# Altium PCB c1yc_ldm.PcbDoc (part 2 of 2)
Units mm, origin at the board's own origin, x right, y up, seen from the top; angles counter-clockwise.
Board outline 258.33 x 60.81 mm, 2 copper layers (Top Layer, Bottom Layer); 98 components, 53 nets, 234 pads, 310 vias.
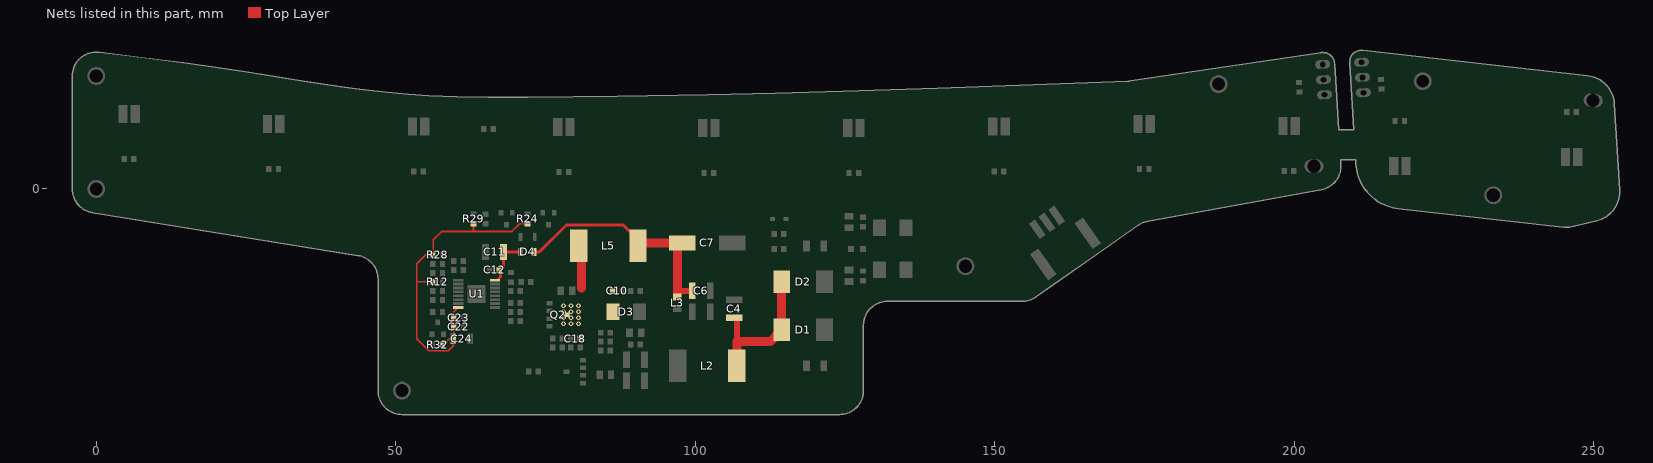
[diagram p2: the nets of this part, all layers, seen from the top]

## Via types
v1: diameter 0.8, hole 0.4, Top Layer to Bottom Layer, 246 vias
v2: diameter 1.2, hole 0.6, Top Layer to Bottom Layer, 50 vias
v3: diameter 0.7, hole 0.4, Top Layer to Bottom Layer, 9 vias
v4: diameter 1.5, hole 1, Top Layer to Bottom Layer, 2 vias
v5: diameter 1, hole 0.6, Top Layer to Bottom Layer, 2 vias
v6: diameter 1.4, hole 0.7, Top Layer to Bottom Layer, 1 vias

## Nets (pads, with @x,y where several pads share a name; then routed paths per layer and width w, separated by ;. In a path a pad name is that pad's centre, name@x,y a point inside that pad or via, vN(x,y) a via of type N, cw(c..) or ccw(c..) an arc to the next point about the centre after c; other vN are vias at no path point) (continued)
SW: C10.2 C18.1 D3.2 L5.1 Q2.5 | length 7.2
  Top Layer w1.5: L5.1@80.55,-9.5 81,-9.95 81,-16.5
  other v1: 78,-22.5 79.25,-22.5 80.5,-22.5 78,-21.5 79.25,-21.5 80.5,-21.5 78,-20.5 79.25,-20.5 80.5,-20.5 78,-19.5 79.25,-19.5 80.5,-19.5
VCOM: C4.2 D1.1 D2.1 L2.2 | length 23
  Top Layer w1: 106.95,-25.5 C4.2@106.95,-21.45
  Top Layer w1.5: L2.2@106.95,-29.5 106.95,-25.5 112.5,-25.5 D1.1@113.5,-24.5 ; D1.1@114.432,-23.5 D2.1@114.432,-15.5
VDD: C22.2 C23.2 C24.2 R12.2 R24.2 R28.2 R29.2 R32.2 U1.8 | length 54.8
  Top Layer w0.3: R12.2@56.2,-15.5 53.5,-15.5 ; R32.2@57.8,-26 57.925,-26 58.925,-25 C24.2@59.6,-25 59.6,-26.15 58.75,-27 55.5,-27 53.5,-25 53.5,-15.5 ; C24.2@59.7,-24.4 C22.2@59.7,-23 C23.2@59.7,-21.5 59.7,-20.525 U1.8@60.45,-19.775 ; R29.2@63,-5.8 63,-7 63.1,-7.1 ; R24.2@72,-5.8 70.7,-5.8 69.4,-7.1 63.1,-7.1 ; 53.5,-15.5 53.5,-12.5 55,-11 R28.2@56.2,-11 56.25,-10.95 56.25,-8.5 57.65,-7.1 63.1,-7.1
VIN: C11.2 C12.2 D4.1 U1.16 | length 8.1
  Top Layer w0.5: U1.16@67,-15.2 67.5,-14.7 67.5,-13.7 C12.2@67.3,-13.5 68,-12.8 C11.2@68,-10.5 D4.1@70.8,-10.5
VLED: C6.2 C7.1 D4.2 L3.1 L5.2 | length 40.5
  Top Layer w0.5: D4.2@73.2,-10.5 74,-10.5 78.5,-6 88,-6 90,-8 L5.2@90,-9.5
  Top Layer w1: L3.1@97,-17.5 97.5,-17 C6.2@99.5,-17
  Top Layer w1.5: L5.2@90,-9.5 90.5,-9 C7.1@97.8,-9 97,-9.8 L3.1@97,-17.5

## Polygon pours and split planes (outlines as drawn)
DGND on Top Layer "Top Ground" (solid, remove dead copper, pour order 213): 254.5,-7.5 254.5,25 209,25 209,-7.5
NetCL5_1 on Top Layer "Top Edge LED" (solid, remove dead copper, pour order 217): 102.512,13 105.5,13 106.5,12.5 106.5,11 102.512,11
NetCL4_1 on Top Layer "Top Edge LED" (solid, remove dead copper, pour order 220): 98,12.5 99,13 102.012,13 102.012,11.316 98,11.316
NetCL3_1 on Top Layer "Top Edge LED" (solid, remove dead copper, pour order 219): 73.5,13.956 77.799,13.956 77.799,11.5 73.5,11.5
NetCL4_1 on Top Layer "Top Edge LED" (solid, remove dead copper, pour order 216): 78.299,13.42 82.5,13.42 82.5,11.504 78.299,11.504
NetCL3_1 on Top Layer "Top Edge LED" (solid, remove dead copper, pour order 215): 54.055,13.464 58,13.464 58,12.001 54.055,12.001
NetCL2_1 on Top Layer "Top Edge LED" (solid, remove dead copper, pour order 218): 49.5,14 53.555,14 53.555,12 49.5,12
NetC27_2 on Top Layer "Top LED" (solid, remove dead copper, pour order 222): 206.86,17 206.86,-4.357 199.378,-4.357 199.378,17
GND_IN on Top Layer "Top" (solid, remove dead copper, pour order 221): 127,-20.5 169.5,-20.5 169.5,-1.5 127,-1.5
NetC30_2 on Top Layer "Top Dual LED" (solid, remove dead copper, pour order 210): 217.361,17 217.361,-4.857 207.36,-4.857 207.36,17
DGND on Top Layer "Top Dual LED" (solid, remove dead copper, pour order 211): 253.86,20 253.86,-7.5 246.543,-7.5 246.543,20
NetCL10_1 on Top Layer "Top Dual LED" (solid, remove dead copper, pour order 212): 246.06,20.643 246.06,-9.857 217.85,-9.857 217.85,20.643
NetCL8_1 on Top Layer "Top LED" (solid, remove dead copper, pour order 223): 198.874,20.143 198.874,2.5 186,0 175.203,0 175.203,20.143
NetCL7_1 on Top Layer "Top LED" (solid, remove dead copper, pour order 224): 174.699,18.143 174.699,0 150.958,0 150.958,18.143
NetCL6_1 on Top Layer "Top LED" (solid, remove dead copper, pour order 225): 150.454,16.643 150.454,0 126.712,0 126.712,16.643
NetCL5_1 on Top Layer "Top LED" (solid, remove dead copper, pour order 226): 126.209,15.143 126.209,0 102.509,0 102.509,15.143
NetCL4_1 on Top Layer "Top LED" (solid, remove dead copper, pour order 227): 102,16.643 102,0 78.3,0 78.3,16.643
NetCL3_1 on Top Layer "Top LED" (solid, remove dead copper, pour order 228): 77.8,19.143 77.8,0 54.055,0 54.055,19.143
NetCL2_1 on Top Layer "Top LED" (solid, remove dead copper, pour order 229): 53.555,19.143 53.555,0 29.88,0 29.88,19.143
NetCL1_1 on Top Layer "Top LED" (solid, remove dead copper, pour order 230): 29.41,25.143 29.41,0 5.73,0 5.73,25.143
NetCL1_2 on Top Layer "Top LED" (solid, remove dead copper, pour order 231): 5.25,25.143 5.25,-2.857 -5.538,-2.857 -5.538,25.143
GND_IN on Top Layer "Top ESD" (solid, remove dead copper, pour order 240): 207.5,-39.857 -24.64,-39.857 -24.64,25.143 207.5,25.143
NetCL1_2 on Top Layer "Top Layer-No Net" (solid, pour order 235): 73.5,-34 80.034,-34 80.034,-26 73.5,-26
NetC15_1 on Top Layer "Top Layer-No Net" (solid, pour order 234): 80,-34 82.5,-34 82.5,-26 80,-26
SW on Top Layer "Top Layer-No Net" (solid, pour order 233): 77.08,-25.5 82.41,-25.5 82.41,-16.5 77.08,-16.5
NetQ2_1 on Top Layer "Top Layer-No Net" (solid, pour order 232): 74.585,-25.557 77.085,-25.557 77.085,-16.557 74.585,-16.557
SW on Top Layer "Top Layer-No Net" (solid, pour order 236): 80,-22.5 88,-22.5 88,-18.25 87,-18.25 87,-16 80,-16 80,-20.5
NetC15_1 on Top Layer "Top Layer-No Net" (solid, pour order 237): 84.5,-32.5 84.5,-29.5 82.5,-29.5 82.5,-32.5
LP on Top Layer "Top Layer-No Net" (solid, pour order 238): 85.5,-29.5 87.5,-29.5 87.5,-23.5 89.5,-23.5 89.5,-34 86,-34 86,-32.5 85.5,-32.5
GND on Top Layer "Top Ground" (solid, remove dead copper, pour order 239): 206.86,-39.857 -24.64,-39.857 -24.64,25.143 206.86,25.143
LGND on Top Layer "Top ESD" (solid, remove dead copper, pour order 214): 209,25.143 255.36,25.143 255.36,-12.357 209,-12.357
DGND on Bottom Layer "Top Ground" (solid, remove dead copper, pour order 244): 254.5,-7.5 254.5,25 209,25 209,-7.5
NetCL4_1 on Bottom Layer "Top Edge LED" (solid, remove dead copper, pour order 251): 98,12.5 99,13 102.012,13 102.012,11.316 98,11.316
NetCL5_1 on Bottom Layer "Top Edge LED" (solid, remove dead copper, pour order 248): 102.512,13 105.5,13 106.5,12.5 106.5,11 102.512,11
NetCL4_1 on Bottom Layer "Top Edge LED" (solid, remove dead copper, pour order 247): 78.299,13.42 82.5,13.42 82.5,11.504 78.299,11.504
NetCL3_1 on Bottom Layer "Top Edge LED" (solid, remove dead copper, pour order 250): 73.5,13.956 77.799,13.956 77.799,11.5 73.5,11.5
NetCL2_1 on Bottom Layer "Top Edge LED" (solid, remove dead copper, pour order 249): 49.5,14 53.555,14 53.555,12 49.5,12
NetCL3_1 on Bottom Layer "Top Edge LED" (solid, remove dead copper, pour order 246): 54.055,13.464 58,13.464 58,12.001 54.055,12.001
GND_IN on Bottom Layer "Bottom ESD" (solid, remove dead copper, pour order 266): 206.86,-39.857 -24.64,-39.857 -24.64,25.143 206.86,25.143
GND on Bottom Layer "Bottom Ground" (solid, remove dead copper, pour order 265): 206.86,-39.857 -24.64,-39.857 -24.64,25.143 206.86,25.143
SW on Bottom Layer "Top Layer-No Net" (solid, pour order 264): 74.5,-25.531 82.5,-25.531 82.5,-16.531 74.5,-16.531
NetCL1_2 on Bottom Layer "Top Layer-No Net" (solid, pour order 263): 74.5,-35 82.5,-35 82.5,-26 74.5,-26
NetCL1_2 on Bottom Layer "Top LED" (solid, remove dead copper, pour order 262): 5.241,25.143 5.241,-2.857 -5.538,-2.857 -5.538,25.143
NetCL1_1 on Bottom Layer "Top LED" (solid, remove dead copper, pour order 261): 29.41,25.143 29.41,0 5.733,0 5.733,25.143
NetCL2_1 on Bottom Layer "Top LED" (solid, remove dead copper, pour order 260): 53.567,19.143 53.567,0 29.88,0 29.88,19.143
NetCL3_1 on Bottom Layer "Top LED" (solid, remove dead copper, pour order 259): 65,19.143 65,0 54.047,0 54.047,19.143
NetCL4_1 on Bottom Layer "Top LED" (solid, remove dead copper, pour order 257): 102.022,16.643 102.022,0 78.304,0 78.304,16.643
NetCL5_1 on Bottom Layer "Top LED" (solid, remove dead copper, pour order 256): 126.209,15.143 126.209,0 102.491,0 102.491,15.143
NetCL6_1 on Bottom Layer "Top LED" (solid, remove dead copper, pour order 255): 150.454,16.643 150.454,0 126.701,0 126.701,16.643
NetCL7_1 on Bottom Layer "Top LED" (solid, remove dead copper, pour order 254): 174.699,18.143 174.699,0 150.969,0 150.969,18.143
NetCL8_1 on Bottom Layer "Top LED" (solid, remove dead copper, pour order 253): 198.874,20.143 198.874,2.5 186,0 175.191,0 175.191,20.143
NetC27_2 on Bottom Layer "Top LED" (solid, remove dead copper, pour order 252): 206.86,13.5 206.86,-4.357 199.342,-4.357 199.342,20.643 202,20.643 202,14.5 203,13.5
NetCL10_1 on Bottom Layer "Bottom Dual LED" (solid, remove dead copper, pour order 243): 246.046,20.643 246.046,-9.857 217.85,-9.857 217.85,20.643
DGND on Bottom Layer "Bottom Dual LED" (solid, remove dead copper, pour order 242): 253.86,17.643 253.86,-9.857 246.543,-9.857 246.543,17.643
NetC30_2 on Bottom Layer "Bottom Dual LED" (solid, remove dead copper, pour order 241): 217.361,17.5 217.361,-4.857 207.36,-4.857 207.36,17.5
LGND on Bottom Layer "Bottom ESD" (solid, remove dead copper, pour order 245): 207.86,25.143 255.36,25.143 255.36,-12.357 207.86,-12.357
NetCL3_1 on Bottom Layer "Top LED" (solid, remove dead copper, pour order 258): 77.8,19.233 77.8,0 66,0 66,19.233

## Keep-outs
Keep-Out Layer:
  lines w1: -0.638,-3.949 cw(c0,0) -4,0 -4,18.863 cw(c0,18.863) 0.492,22.833 ; -0.638,-3.949 43.688,-11.107 ; -0.638,-3.949 -0.638,-3.949 ; 0.492,22.833 0.492,22.833 ; 0.492,22.833 6.956,22.031 15.177,20.975 19.285,20.396 25.447,19.456 34.69,17.982 40.857,17.063 43.944,16.653 48.579,16.127 52.059,15.814 55.543,15.578 60.194,15.382 65.368,15.303 69.51,15.309 72.152,15.325 87.024,15.485 102.13,15.754 113.317,16.009 124.644,16.309 124.644,16.309 ccw(c15.57,3785.374) 172.257,17.988 172.257,17.987 ccw(c172.092,21.983) 172.683,18.027 ; 43.688,-11.107 cw(c43.051,-15.055) 47.051,-15.055 47.051,-33.654 ccw(c51.051,-33.654) 51.051,-37.654 124.084,-37.654 ccw(c124.084,-33.654) 128.084,-33.654 128.084,-22.763 cw(c132.084,-22.763) 132.084,-18.763 154.542,-18.763 ccw(c154.542,-14.763) 156.836,-18.039 ; 43.688,-11.107 43.688,-11.107 ; 156.836,-18.039 159.855,-15.926 168.046,-10.19 174,-6.021 ; 156.836,-18.039 156.836,-18.039 ; 172.683,18.027 172.683,18.027 ; 172.683,18.027 204.436,22.77 ; 174,-6.021 cw(c176.294,-9.298) 175.581,-5.362 ; 174,-6.021 174,-6.021 ; 175.581,-5.362 204.501,-0.121 ; 175.581,-5.362 175.581,-5.362 ; 204.436,22.77 cw(c204.732,20.792) 206.728,20.917 ; 204.436,22.77 204.436,22.77 ; 204.501,-0.121 ccw(c203.788,3.815) 207.78,4.064 ; 204.501,-0.121 204.501,-0.121 ; 206.728,20.917 206.728,20.917 ; 206.728,20.917 207.418,9.863 ; 207.418,9.863 209.923,9.863 ; 207.418,9.863 207.73,4.863 ; 207.73,4.863 210.235,4.863 ; 207.73,4.863 207.78,4.064 ; 207.78,4.064 207.78,4.064 ; 209.923,9.863 209.225,21.033 cw(c211.221,21.157) 211.445,23.145 ; 209.923,9.863 210.235,4.863 ; 210.235,4.863 210.278,4.172 ccw(c218.263,4.671) 217.367,-3.279 ; 211.445,23.145 211.445,23.145 ; 211.445,23.145 248.989,18.916 ; 217.367,-3.279 244.89,-6.379 ; 217.367,-3.279 217.367,-3.279 ; 244.89,-6.379 ccw(c245.45,-1.41) 246.668,-6.26 ; 244.89,-6.379 244.89,-6.379 ; 246.668,-6.26 250.546,-5.285 ; 246.668,-6.26 246.668,-6.26 ; 248.989,18.916 cw(c248.43,13.947) 253.42,14.259 ; 248.989,18.916 248.989,18.916 ; 250.546,-5.285 ccw(c249.328,-0.436) 254.318,-0.124 ; 250.546,-5.285 250.546,-5.285 ; 253.42,14.259 253.42,14.259 ; 253.42,14.259 254.318,-0.124 ; 254.318,-0.124 254.318,-0.124

## Silkscreen, mask and mechanical layers (free items; w line width, h text height)
Top Overlay:
  region: 21.86,-23.357 31.86,-23.357 31.86,-27.357 21.86,-27.357
  text "PRK" at 164,-3 h1.2
  text "DRL" at 151,-10.5 h1.2
  text ".PartName" at -2.64,-19.357 h4
  text ".PartPCB" at -2.64,-22.857 h4
  text ".PartRevision" at 22.36,-22.857 h4
  text ".PartAssembly" at -2.64,-26.357 h4
Top Solder:
  rectangle: 62.25,-21.25 64.75,-19.75
  rectangle: 62.25,-15.25 64.75,-13.75
  rectangle: 77.25,-32.5 78.25,-28.5
  rectangle: 79,-23 80,-19
  lines w0.5: 4.48,9.982 3.48,9.982 2.48,10.482 2.48,14.482 3.48,14.982 4.48,14.982 ; 6.48,9.982 7.48,9.982 8.48,10.482 8.48,14.482 7.48,14.982 6.48,14.982 ; 28.633,8.359 27.633,8.359 26.633,8.859 26.633,12.859 27.633,13.359 28.633,13.359 ; 30.633,8.359 31.633,8.359 32.633,8.859 32.633,12.859 31.633,13.359 30.633,13.359 ; 52.806,7.898 51.806,7.898 50.806,8.398 50.806,12.398 51.806,12.898 52.806,12.898 ; 54.806,7.898 55.806,7.898 56.806,8.398 56.806,12.398 55.806,12.898 54.806,12.898 ; 77.049,7.854 76.049,7.854 75.049,8.354 75.049,12.354 76.049,12.854 77.049,12.854 ; 79.049,7.854 80.049,7.854 81.049,8.354 81.049,12.354 80.049,12.854 79.049,12.854 ; 83,-27 84.2,-27 ; 101.262,7.67 100.262,7.67 99.262,8.17 99.262,12.17 100.262,12.67 101.262,12.67 ; 103.262,7.67 104.262,7.67 105.262,8.17 105.262,12.17 104.262,12.67 103.262,12.67 ; 125.469,7.687 124.469,7.687 123.469,8.187 123.469,12.187 124.469,12.687 125.469,12.687 ; 127.469,7.687 128.469,7.687 129.469,8.187 129.469,12.187 128.469,12.687 127.469,12.687 ; 149.708,7.901 148.708,7.901 147.708,8.401 147.708,12.401 148.708,12.901 149.708,12.901 ; 151.708,7.901 152.708,7.901 153.708,8.401 153.708,12.401 152.708,12.901 151.708,12.901 ; 173.95,8.321 172.95,8.321 171.95,8.821 171.95,12.821 172.95,13.321 173.95,13.321 ; 175.95,8.321 176.95,8.321 177.95,8.821 177.95,12.821 176.95,13.321 175.95,13.321 ; 198.124,7.975 197.124,7.975 196.124,8.475 196.124,12.475 197.124,12.975 198.124,12.975 ; 200.124,7.975 201.124,7.975 202.124,8.475 202.124,12.475 201.124,12.975 200.124,12.975 ; 214.605,2.818 214.605,5.818 215.605,6.318 216.605,6.318 ; 218.605,1.318 219.605,1.318 220.605,1.818 220.605,5.818 219.605,6.318 218.605,6.318 ; 245.298,2.831 244.298,2.831 243.298,3.331 243.298,7.331 244.298,7.831 245.298,7.831 ; 247.298,2.831 248.298,2.831 249.298,3.331 249.298,7.331 248.298,7.831 247.298,7.831
Bottom Solder:
  rectangle: 79,-23 80,-19
  rectangle: 77.25,-32.5 78.25,-28.5
  rectangle: 62.25,-15.25 64.75,-13.75
  rectangle: 62.25,-21.25 64.75,-19.75
  lines w0.5: 4.48,9.982 3.48,9.982 2.48,10.482 2.48,14.482 3.48,14.982 4.48,14.982 ; 6.48,9.982 7.48,9.982 8.48,10.482 8.48,14.482 7.48,14.982 6.48,14.982 ; 28.633,8.359 27.633,8.359 26.633,8.859 26.633,12.859 27.633,13.359 28.633,13.359 ; 30.633,8.359 31.633,8.359 32.633,8.859 32.633,12.859 31.633,13.359 30.633,13.359 ; 52.806,7.898 51.806,7.898 50.806,8.398 50.806,12.398 51.806,12.898 52.806,12.898 ; 54.806,7.898 55.806,7.898 56.806,8.398 56.806,12.398 55.806,12.898 54.806,12.898 ; 77.049,7.854 76.049,7.854 75.049,8.354 75.049,12.354 76.049,12.854 77.049,12.854 ; 79.049,7.854 80.049,7.854 81.049,8.354 81.049,12.354 80.049,12.854 79.049,12.854 ; 101.262,7.67 100.262,7.67 99.262,8.17 99.262,12.17 100.262,12.67 101.262,12.67 ; 103.262,7.67 104.262,7.67 105.262,8.17 105.262,12.17 104.262,12.67 103.262,12.67 ; 125.469,7.687 124.469,7.687 123.469,8.187 123.469,12.187 124.469,12.687 125.469,12.687 ; 127.469,7.687 128.469,7.687 129.469,8.187 129.469,12.187 128.469,12.687 127.469,12.687 ; 149.708,7.901 148.708,7.901 147.708,8.401 147.708,12.401 148.708,12.901 149.708,12.901 ; 151.708,7.901 152.708,7.901 153.708,8.401 153.708,12.401 152.708,12.901 151.708,12.901 ; 173.95,8.321 172.95,8.321 171.95,8.821 171.95,12.821 172.95,13.321 173.95,13.321 ; 175.95,8.321 176.95,8.321 177.95,8.821 177.95,12.821 176.95,13.321 175.95,13.321 ; 198.124,7.975 197.124,7.975 196.124,8.475 196.124,12.475 197.124,12.975 198.124,12.975 ; 200.124,7.975 201.124,7.975 202.124,8.475 202.124,12.475 201.124,12.975 200.124,12.975 ; 214.605,2.818 214.605,5.818 215.605,6.318 216.605,6.318 ; 218.605,1.318 219.605,1.318 220.605,1.818 220.605,5.818 219.605,6.318 218.605,6.318 ; 245.298,2.831 244.298,2.831 243.298,3.331 243.298,7.331 244.298,7.831 245.298,7.831 ; 247.298,2.831 248.298,2.831 249.298,3.331 249.298,7.331 248.298,7.831 247.298,7.831
Mechanical 3:
  circle w0.2: c145.098,-12.885 r8
  circle w0.2: c0,0 r8
  circle w0.2: c187.366,17.511 r8
  circle w0.2: c0,18.863 r8
  circle w0.2: c51.051,-33.654 r8
  circle w0.2: c221.438,17.994 r8
  circle w0.2: c233.226,-1.04 r8
  lines w0.15: 35.36,-9.857 35.36,-2.357 162.86,-2.357 ; 137.86,-9.857 137.86,-2.357
Drill Drawing:
  lines w0.15: -0.638,-3.949 cw(c0,0) -4,0 -4,18.863 cw(c0,18.863) 0.492,22.833 ; -0.638,-3.949 43.688,-11.107 ; -0.638,-3.949 -0.638,-3.949 ; 0.492,22.833 0.492,22.833 ; 0.492,22.833 6.956,22.031 15.177,20.975 19.285,20.396 25.447,19.456 34.69,17.982 40.857,17.063 43.944,16.653 48.579,16.127 52.059,15.814 55.543,15.578 60.194,15.382 65.368,15.303 69.51,15.309 72.152,15.325 87.024,15.485 102.13,15.754 113.317,16.009 124.644,16.309 124.644,16.309 ccw(c15.57,3785.374) 172.257,17.988 172.257,17.987 ccw(c172.092,21.983) 172.683,18.027 ; 43.688,-11.107 cw(c43.051,-15.055) 47.051,-15.055 47.051,-33.654 ccw(c51.051,-33.654) 51.051,-37.654 124.084,-37.654 ccw(c124.084,-33.654) 128.084,-33.654 128.084,-22.763 cw(c132.084,-22.763) 132.084,-18.763 154.542,-18.763 ccw(c154.542,-14.763) 156.836,-18.039 ; 43.688,-11.107 43.688,-11.107 ; 156.836,-18.039 159.855,-15.926 168.046,-10.19 174,-6.021 ; 156.836,-18.039 156.836,-18.039 ; 172.683,18.027 172.683,18.027 ; 172.683,18.027 204.436,22.77 ; 174,-6.021 cw(c176.294,-9.298) 175.581,-5.362 ; 174,-6.021 174,-6.021 ; 175.581,-5.362 204.501,-0.121 ; 175.581,-5.362 175.581,-5.362 ; 204.436,22.77 cw(c204.732,20.792) 206.728,20.917 ; 204.436,22.77 204.436,22.77 ; 204.501,-0.121 ccw(c203.788,3.815) 207.78,4.064 ; 204.501,-0.121 204.501,-0.121 ; 206.728,20.917 206.728,20.917 ; 206.728,20.917 207.418,9.863 209.923,9.863 209.225,21.033 cw(c211.221,21.157) 211.445,23.145 ; 207.78,4.064 207.73,4.863 210.235,4.863 210.278,4.172 ccw(c218.263,4.671) 217.367,-3.279 ; 207.78,4.064 207.78,4.064 ; 211.445,23.145 211.445,23.145 ; 211.445,23.145 248.989,18.916 ; 217.367,-3.279 244.89,-6.379 ; 217.367,-3.279 217.367,-3.279 ; 244.89,-6.379 ccw(c245.45,-1.41) 246.668,-6.26 ; 244.89,-6.379 244.89,-6.379 ; 246.668,-6.26 250.546,-5.285 ; 246.668,-6.26 246.668,-6.26 ; 248.989,18.916 cw(c248.43,13.947) 253.42,14.259 ; 248.989,18.916 248.989,18.916 ; 250.546,-5.285 ccw(c249.328,-0.436) 254.318,-0.124 ; 250.546,-5.285 250.546,-5.285 ; 253.42,14.259 253.42,14.259 ; 253.42,14.259 254.318,-0.124 ; 254.318,-0.124 254.318,-0.124
Mechanical 27:
  circle w0.001: c217.605,3.818 r0.001
  circle w0.001: c246.298,5.331 r0.001
  circle w0.003: c-1.584,19.644 r1
  circle w0.003: c186.142,14.665 r1
  circle w0.003: c158.448,-32.356 r1
  circle w0.003: c40.361,-32.356 r1
  circle w0.003: c203.445,18.089 r0.475
  circle w0.003: c203.604,15.554 r0.475
  circle w0.003: c203.762,13.019 r0.475
  circle w0.003: c216.116,15.746 r1
  circle w0.003: c241.301,-4.797 r1
  circle w0.003: c209.935,18.454 r0.475
  circle w0.003: c210.252,13.384 r0.475
  circle w0.003: c210.093,15.919 r0.475
  circle w0.001: c-15.202,15.8 r0.001
  circle w0.001: c10.946,10.477 r0.001
  circle w0.001: c37.664,9.258 r0.001
  circle w0.001: c64.413,8.869 r0.001
  circle w0.001: c91.164,8.666 r0.001
  circle w0.001: c117.916,8.658 r0.001
  circle w0.001: c144.667,8.797 r0.001
  circle w0.001: c172.419,10.787 r0.001
  circle w0.001: c199.124,10.475 r0.001
  circle w0.001: c10.946,10.477 r0.001
  circle w0.001: c-15.202,15.8 r0.001
  circle w0.001: c64.414,8.869 r0.001
  circle w0.001: c91.165,8.666 r0.001
  circle w0.001: c117.917,8.658 r0.001
  circle w0.001: c144.668,8.797 r0.001
  circle w0.001: c172.419,10.787 r0.001
  circle w0.001: c199.125,10.475 r0.001
  circle w0.001: c217.605,3.818 r0.001
  circle w0.001: c246.298,5.331 r0.001
  lines w0.003: -18.358,9.548 -15.325,8.518 -12.262,7.59 -9.175,6.763 -6.067,6.032 -2.907,5.387 0.266,4.83 3.447,4.355 5.836,4.047 8.226,3.777 11.516,3.461 14.803,3.202 18.67,2.957 22.527,2.764 26.208,2.618 33.544,2.403 40.855,2.253 55.447,2.036 77.15,1.807 98.288,1.707 111.04,1.704 123.791,1.734 149.298,1.897 165.901,2.077 182.485,2.309 198.291,2.576 ; 203.619,15.559 209.139,15.87 ; 249.26,-7.988 245.382,-8.963 cw(c244.164,-4.113) 243.604,-9.082 219.552,-6.373 cw(c220.112,-1.404) 216.804,-5.153 210.527,0.386 cw(c213.835,4.135) 208.845,3.823 207.939,18.33 cw(c209.935,18.454) 210.159,20.442 247.703,16.213 cw(c247.143,11.244) 252.134,11.556 253.032,-2.827 cw(c248.042,-3.139) 249.26,-7.988 ; -23.173,4.656 ccw(c-18.173,4.656) -18.97,-0.28 31.158,-8.374 cw(c30.361,-13.31) 35.361,-13.31 35.361,-32.356 ccw(c40.361,-32.356) 40.361,-37.356 158.448,-37.356 ccw(c158.448,-32.356) 163.448,-32.356 163.448,-13.655 cw(c168.448,-13.655) 167.623,-8.723 202.269,-2.933 ccw(c201.444,1.998) 206.435,2.31 205.442,18.214 ccw(c203.445,18.089) 203.15,20.067 194.07,18.711 cw(c193.331,23.656) 193.613,18.664 143.743,15.845 cw(c103.597,551.46) -0.614,24.549 ccw(c-1.584,19.644) -1.584,24.644 -14.102,24.644 ccw(c-14.102,19.644) -17.638,23.179 -21.709,19.108 ccw(c-18.173,15.573) -23.173,15.573 -23.173,4.656
Mechanical 28:
  circle w0.001: c199.124,10.475 r0.001
  circle w0.001: c172.418,10.786 r0.001
  circle w0.001: c144.667,8.797 r0.001
  circle w0.001: c117.916,8.657 r0.001
  circle w0.001: c91.164,8.666 r0.001
  circle w0.001: c64.413,8.869 r0.001
  circle w0.001: c37.664,9.257 r0.001
  circle w0.001: c10.946,10.477 r0.001
  circle w0.001: c-15.202,15.8 r0.001
  circle w0.003: c210.093,15.919 r0.475
  circle w0.003: c210.252,13.384 r0.475
  circle w0.003: c209.935,18.454 r0.475
  circle w0.003: c241.301,-4.797 r1
  circle w0.003: c216.116,15.745 r1
  circle w0.003: c203.762,13.019 r0.475
  circle w0.003: c203.603,15.554 r0.475
  circle w0.003: c203.445,18.089 r0.475
  circle w0.003: c40.36,-32.357 r1
  circle w0.003: c158.447,-32.357 r1
  circle w0.003: c186.142,14.665 r1
  circle w0.003: c-1.584,19.643 r1
  circle w0.001: c246.298,5.331 r0.001
  circle w0.001: c217.604,3.818 r0.001
  circle w0.001: c10.946,10.477 r0.001
  circle w0.001: c-15.202,15.8 r0.001
  circle w0.001: c64.413,8.869 r0.001
  circle w0.001: c91.165,8.666 r0.001
  circle w0.001: c117.917,8.658 r0.001
  circle w0.001: c144.668,8.797 r0.001
  circle w0.001: c172.419,10.786 r0.001
  circle w0.001: c199.124,10.475 r0.001
  circle w0.001: c217.604,3.818 r0.001
  circle w0.001: c246.298,5.331 r0.001
  lines w0.003: 205.441,18.213 ccw(c203.445,18.089) 203.15,20.067 194.07,18.711 cw(c193.331,23.656) 193.613,18.664 143.742,15.844 cw(c103.596,551.46) -0.614,24.548 ccw(c-1.584,19.643) -1.584,24.643 -14.103,24.643 ccw(c-14.103,19.643) -17.638,23.179 -21.709,19.108 ccw(c-18.174,15.572) -23.174,15.572 -23.174,4.656 ccw(c-18.174,4.656) -18.971,-0.28 31.158,-8.375 cw(c30.36,-13.311) 35.36,-13.311 35.36,-32.357 ccw(c40.36,-32.357) 40.36,-37.357 158.447,-37.357 ccw(c158.447,-32.357) 163.447,-32.357 163.447,-13.655 cw(c168.447,-13.655) 167.623,-8.724 202.268,-2.933 ccw(c201.444,1.998) 206.434,2.31 ; 207.939,18.33 cw(c209.935,18.454) 210.159,20.442 247.703,16.213 cw(c247.143,11.244) 252.133,11.556 ; 208.845,3.823 ccw(c213.835,4.134) 210.527,0.385 216.804,-5.154 ; 216.803,-5.154 ccw(c220.112,-1.404) 219.552,-6.373 243.604,-9.082 ccw(c244.163,-4.114) 245.382,-8.963 249.26,-7.988 ccw(c248.041,-3.139) 253.032,-2.827 252.133,11.556
  lines w0.15: 205.441,18.213 205.789,12.643 208.294,12.643 207.939,18.33 ; 206.434,2.31 206.101,7.643 208.606,7.643 208.845,3.823
Mechanical 30:
  drawing of 152 lines, arcs and shapes, not listed
Mechanical 31:
  circle w0.006: c199.124,10.475 r0.003
  circle w0.006: c174.95,10.822 r0.003
  circle w0.006: c150.708,10.401 r0.003
  circle w0.006: c126.468,10.187 r0.003
  circle w0.006: c102.259,10.17 r0.003
  circle w0.006: c78.05,10.354 r0.003
  circle w0.006: c53.805,10.398 r0.003
  circle w0.006: c29.63,10.858 r0.003
  circle w0.006: c5.48,12.482 r0.003
  circle w0.013: c210.093,15.919 r0.475
  circle w0.013: c210.252,13.384 r0.475
  circle w0.013: c209.935,18.454 r0.475
  circle w0.013: c241.301,-4.797 r1
  circle w0.013: c216.116,15.745 r1
  circle w0.013: c244.65,4.602 r0.263
  circle w0.013: c215.835,2.692 r0.255
  circle w0.013: c203.762,13.019 r0.475
  circle w0.013: c203.604,15.554 r0.475
  circle w0.013: c203.445,18.089 r0.475
  circle w0.013: c76.758,-32.357 r1
  circle w0.013: c158.447,-32.357 r1
  circle w0.013: c186.142,14.665 r1
  circle w0.013: c0,18.863 r1
  lines w0.013: 216.804,-5.154 210.527,0.385 cw(c213.835,4.134) 208.845,3.823 207.939,18.329 cw(c209.935,18.454) 210.159,20.442 247.703,16.213 cw(c247.143,11.244) 252.133,11.556 253.032,-2.827 cw(c248.041,-3.139) 249.26,-7.988 245.382,-8.963 cw(c244.163,-4.114) 243.604,-9.082 219.552,-6.373 cw(c220.112,-1.404) 216.804,-5.154 ; -5,1.721 ccw(c0,1.721) -0.797,-3.215 67.556,-14.252 cw(c66.758,-19.188) 71.758,-19.188 71.758,-32.357 ccw(c76.758,-32.357) 76.758,-37.357 158.447,-37.357 ccw(c158.447,-32.357) 163.447,-32.357 163.447,-13.655 cw(c168.447,-13.655) 167.623,-8.724 202.268,-2.933 ccw(c201.444,1.998) 206.434,2.31 205.441,18.213 ccw(c203.445,18.089) 203.15,20.067 168.229,14.851 cw(c167.49,19.796) 167.556,14.796 142.802,14.543 126.834,14.449 110.868,14.396 98.651,14.402 86.415,14.456 72.525,14.554 57.195,14.692 0.797,23.799 ccw(c0,18.863) -5,18.863 -5,1.721

## Text inside footprints (layer, text, board x,y; h text height)
J2: Top Overlay "1" at 204.739,13.989 h0.8 r273.58
J3: Top Overlay "1" at 211.229,14.355 h0.8 r273.58